# EAGLE board Ir car transmitter (EAGLE 9.7.0)

Size 109.32 x 61.76 mm. Coordinates in mm from the lower left corner, seen from the top.
Outline: 0,0 109.32,0 109.32,61.76 0,61.76 0,0
Copper layers (1*16): Top 0.035mm / dielectric 1.5mm / Bottom 0.035mm
Design rules "default": minimum track width 6mil, minimum drill 0.35mm, track to track 6mil, track to pad 6mil, pad to pad 6mil, via to via 6mil, smd to smd 6mil, copper to edge 40mil, drill to drill 6mil, minimum pad ring 10mil, minimum via ring 8mil, stop-mask expansion 4mil, vias tented up to drill 0mil, thermal gap 10mil

## Footprints (pad centres in the part's own frame; a part is rotated, then mirrored left to right if it is on the bottom)
BATTERY-GENERIC = drill 1.118 pad 3.15 octagon: + 2.54,0; - -2.54,0
CAP-THRU-2.54MM = drill 1.016 pad 1.88: 1 -1.27,0; 2 1.27,0
LEDRD254W60D565H860B = drill 0.981 pad 1.581: 1 -1.27,0; 2 1.27,0
RESAD1016W63L850D250B = drill 0.83 pad 1.43: 1 -5.08,0; 2 5.08,0
SWITCH-MOMENTARY-PTH-6.5MM = drill 1.016 pad 1.88: 1 -3.251,2.261; 2 3.251,2.261; 3 -3.251,-2.261; 4 3.251,-2.261
TO92 = drill 0.813 octagon: 1 -1.27,0; 2 0,1.905; 3 1.27,0
DIP787W55P254L958H533Q8B-8P3 = drill 0.852 pad 1.452: 1 -3.81,3.81; 2 -3.81,1.27; 3 -3.81,-1.27; 4 -3.81,-3.81; 5 3.81,-3.81; 6 3.81,-1.27; 7 3.81,1.27; 8 3.81,3.81

## Placement (x,y rotation side)
BAT1  4.5V  [BATTERY-GENERIC]  8.26,53.5 0 top
C1  0.1u  [CAP-THRU-2.54MM]  83.84,21.67 180 top
D1  RED  [LEDRD254W60D565H860B]  91.46,34.37 0 top
R1  100  [RESAD1016W63L850D250B]  90.19,44.53 270 top
R2  100  [RESAD1016W63L850D250B]  90.19,31.83 0 top
R3  10k  [RESAD1016W63L850D250B]  74.95,8.97 90 top
R4  10k  [RESAD1016W63L850D250B]  100.35,31.83 0 top
S1  SWITCH_MOMENTARY  [SWITCH-MOMENTARY-PTH-6.5MM]  59.71,28.02 90 top
T2  NMOSFET  [TO92]  95.27,36.91 0 top
U2  ATtiny25-20PU  [DIP787W55P254L958H533Q8B-8P3]  78.76,28.02 90 top

## Library data of the parts
BAT1 C1 R1-R4 S1 = Tinkercad
D1 = Tinkercad; CATEGORY: Opto-Electronic; SUB-CATEGORY: LED; VALUE: LED_RED
T2 = Tinkercad; CATEGORY: Transistor; SUB-CATEGORY: MOSFET; TYPE: N-Channel
U2 = Tinkercad; CATEGORY: IC_Embedded; CORE: AVR; DESCRIPTION: AVR AVR® ATtiny, Functional Safety (FuSa) Microcontroller IC 8-Bit 20MHz 2KB (1K x 16) FLASH 8-PDIP; MANUFACTURER: Microchip Technology; MPN: ATtiny25-20PU; OPERATING_TEMP: -40°C to 85°C; PART_STATUS: Active; ROHS_COMPLIANT: COMPLIANT; SERIES: ATtiny25; SPEED: 20 MHz; SUB-CATEGORY: Microcontroller; TYPE: AVR Microcontroller

## Nets
BAT1+: BAT1.+ C1.1 R1.1 R3.1 U2.8
BAT1-: BAT1.- C1.2 R4.2 S1.1 S1.2 T2.3 U2.4
D1_A: D1.1 R1.2
D1_C: D1.2 T2.1
T2_G: R2.2 R4.1 T2.2
U2_PB0: R2.1 U2.5
U2_PB2: S1.3 S1.4 U2.7
U2_PB5/!RESET!: R3.2 U2.1

## Tracks (layer width: path | path; a pad name or v marks a point on that pad's centre or on a via)
BAT1+  (4 unrouted)
BAT1-  (6 unrouted)
D1_A  (1 unrouted)
D1_C  (1 unrouted)
T2_G  (2 unrouted)
U2_PB0  (1 unrouted)
U2_PB2  (2 unrouted)
U2_PB5/!RESET!  (1 unrouted)